# Altium PCB semiflex-1.PcbDoc (part 2 of 2)
Units mil, origin at the board's own origin, x right, y up, seen from the top; angles counter-clockwise.
Board outline 1000.01 x 1200 mil, 2 copper layers (Top Layer, Bottom Layer), stack 0.552 mil thick; 55 components, 23 nets, 170 pads, 58 vias.
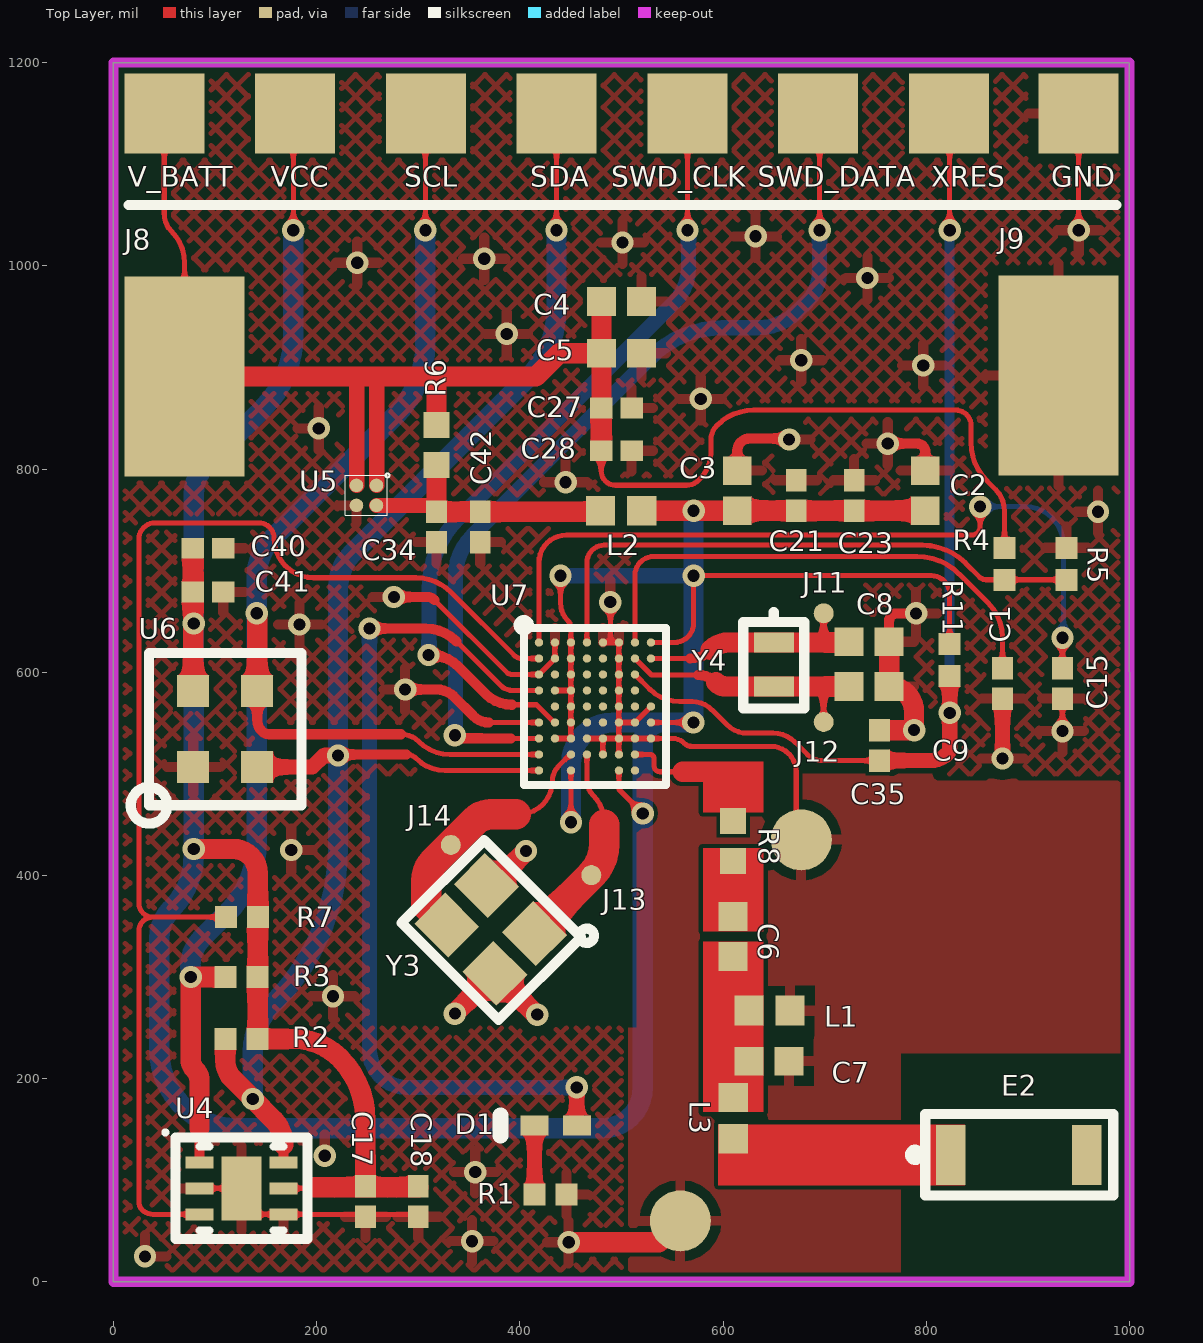
[diagram p0: Top Layer view]

## Polygon pours and split planes (outlines as drawn) (continued)
GND on Bottom Layer "GND_BOTTOM" (hatched 45Degree grid 15 track 5, remove dead copper, pour order 1008): 0,0 0,1200 1000,1200 1000,500 500,500 500,0
GND on Bottom Layer "RF_GND_BOTTOM" (hatched 90Degree grid 15 track 5, remove dead copper, shelved, pour order 1016): 500,0 500,500 1000,500 1000,0

## Keep-outs
Keep-Out Layer:
  the board outline again, w10

## Other copper
Top Layer:
  rectangle net ANTENNA: 580,462 640,512
  rectangle net NetC6_1: 580,345 640,427
  rectangle net NetC6_2: 580,167 640,335
  rectangle net NetE2_1: 595,95 838,155
  pour cut-out: 572,695 740,695 740,540 570.8,540 570.8,550.5
  pour cut-out: 1000,0 775,0 775,225 1000,225
  pour cut-out: 515,500 250,500 250,250 515,250
Bottom Layer:
  pour cut-out: 1000,0 775,0 775,225 1000,225

## Silkscreen, mask and mechanical layers (free items; w line width, h text height)
Top Overlay:
  lines w10: 15,1060 987,1060
Mechanical 1:
  lines w3.94: 0,1000 0,-0.06 1000,-0.06 1000,1000
  lines w4: 0,1000 1000,1000
Mechanical 3:
  the board outline again, w10